# EAGLE board CT_schematic (EAGLE 7.6.0)

Size 100 x 80 mm. Coordinates in mm from the lower left corner, seen from the top.
Outline: 0,0 100,0 100,80 0,80 0,0
Copper layers (1*16): Top 0.035mm / dielectric 1.5mm / Bottom 0.035mm
Design rules "default": minimum track width 10mil, minimum drill 24mil, track to track 8mil, track to pad 8mil, pad to pad 8mil, via to via 8mil, smd to smd 8mil, copper to edge 40mil, drill to drill 8mil, minimum pad ring 10mil, minimum via ring 8mil, stop-mask expansion 4mil, vias tented up to drill 0mil, thermal gap 10mil

## Footprints (pad centres in the part's own frame; a part is rotated, then mirrored left to right if it is on the bottom)
C0603 = smd 0.8 x 0.8: 1 -0.762,0; 2 0.762,0
C0402 = smd 0.5 x 0.5: 1 -0.508,0; 2 0.508,0
C1206 = smd 1.3 x 1.6: 1 -1.524,0; 2 1.524,0
C1210 = smd 1.2 x 2.5: 1 -1.524,0; 2 1.524,0
EXV-9H = smd 3.505 x 1.676: 1 -2.857,0; 2 2.857,0
L0603 = smd 0.8 x 0.8: 1 -0.762,0; 2 0.762,0
L1210 = smd 1.2 x 2.5: 1 -1.524,0; 2 1.524,0
PJ-037B_PACKAGE = drill 3.7 square: 1 12,0 | drill 3.2 square: 2 6,0
R0603 = smd 0.8 x 0.8: 1 -0.762,0; 2 0.762,0
LQFP48 = smd 0.3 x 1.2: 1 -2.75,-4.25; 2 -2.25,-4.25; 3 -1.75,-4.25; 4 -1.25,-4.25; 5 -0.75,-4.25; 6 -0.25,-4.25; 7 0.25,-4.25; 8 0.75,-4.25; 9 1.25,-4.25; 10 1.75,-4.25; 11 2.25,-4.25; 12 2.75,-4.25; 25 2.75,4.25; 26 2.25,4.25; 27 1.75,4.25; 28 1.25,4.25; 29 0.75,4.25; 30 0.25,4.25; 31 -0.25,4.25; 32 -0.75,4.25; 33 -1.25,4.25; 34 -1.75,4.25; 35 -2.25,4.25; 36 -2.75,4.25 | smd 1.2 x 0.3: 13 4.25,-2.75; 14 4.25,-2.25; 15 4.25,-1.75; 16 4.25,-1.25; 17 4.25,-0.75; 18 4.25,-0.25; 19 4.25,0.25; 20 4.25,0.75; 21 4.25,1.25; 22 4.25,1.75; 23 4.25,2.25; 24 4.25,2.75; 37 -4.25,2.75; 38 -4.25,2.25; 39 -4.25,1.75; 40 -4.25,1.25; 41 -4.25,0.75; 42 -4.25,0.25; 43 -4.25,-0.25; 44 -4.25,-0.75; 45 -4.25,-1.25; 46 -4.25,-1.75; 47 -4.25,-2.25; 48 -4.25,-2.75
SSOP-16 = smd 1.981 x 0.356: 1 -2.464,2.223; 2 -2.464,1.587; 3 -2.464,0.953; 4 -2.464,0.318; 5 -2.464,-0.318; 6 -2.464,-0.953; 7 -2.464,-1.587; 8 -2.464,-2.223; 9 2.464,-2.223; 10 2.464,-1.587; 11 2.464,-0.953; 12 2.464,-0.318; 13 2.464,0.318; 14 2.464,0.953; 15 2.464,1.587; 16 2.464,2.223
182-009-MALE = drill 1.194 pad 1.524 octagon: 1 -5.537,10.923; 2 -2.769,10.923; 3 0,10.923; 4 2.769,10.923; 5 5.537,10.923; 6 -4.153,8.08; 7 -1.384,8.08; 8 1.384,8.08; 9 4.153,8.08 | hole 3.048: -12.446,9.501; 12.446,9.501
SOIC-8 = smd 1.6 x 0.6: 1 -2.7,1.905 | smd 1.55 x 0.6: 2 -2.7,0.635; 3 -2.7,-0.635; 4 -2.7,-1.905; 5 2.7,-1.905; 6 2.7,-0.635; 7 2.7,0.635; 8 2.7,1.905
SSOP-28 = smd 1.5 x 0.4: 1 -3.625,4.225; 2 -3.625,3.575; 3 -3.625,2.925; 4 -3.625,2.275; 5 -3.625,1.625; 6 -3.625,0.975; 7 -3.625,0.325; 8 -3.625,-0.325; 9 -3.625,-0.975; 10 -3.625,-1.625; 11 -3.625,-2.275; 12 -3.625,-2.925; 13 -3.625,-3.575; 14 -3.625,-4.225; 15 3.625,-4.225; 16 3.625,-3.575; 17 3.625,-2.925; 18 3.625,-2.275; 19 3.625,-1.625; 20 3.625,-0.975; 21 3.625,-0.325; 22 3.625,0.325; 23 3.625,0.975; 24 3.625,1.625; 25 3.625,2.275; 26 3.625,2.925; 27 3.625,3.575; 28 3.625,4.225
HTSS-105-01-G-D = drill 1 pad 1.8 square: 1 0,0 | drill 1 pad 1.8: 2 0,2.54; 3 2.54,0; 4 2.54,2.54; 5 5.08,0; 6 5.08,2.54; 7 7.62,0; 8 7.62,2.54; 9 10.16,0; 10 10.16,2.54
ABLS-25.000MHZ-B2F-T = smd 5.6 x 2.8: 1 -3.81,0; 2 5.69,0
ASEK = smd 1.4 x 1: 1 -1.1,-0.8; 2 1.1,-0.8; 3 1.1,0.8; 4 -1.1,0.8
WSON-8 = smd 0.3 x 0.6: 1 -0.75,0; 2 0.05,0; 3 0.85,0; 4 1.65,0; 5 1.65,3.8; 6 0.85,3.8; 7 0.05,3.8; 8 -0.75,3.8 | smd 3 x 2.6: PAD 0.45,1.9
SON-6 = smd 0.55 x 0.3: 1 -0.355,0.5 | smd 0.52 x 0.3: 2 -0.37,0; 3 -0.37,-0.5; 4 0.37,-0.5; 5 0.37,0; 6 0.37,0.5
SW_4-1437565-2 = smd 1.4 x 2.1: 1 -2.23,4.55; 2 -2.23,-4.55; 3 2.23,4.55; 4 2.23,-4.55
LGM67K-G1J2-24-Z = smd 0.8 x 1.4: A -2,0; C 0,0
NC7SZ125M5X = smd 1.3 x 0.7: 1 -1.3,0.95; 2 -1.3,0; 3 -1.3,-0.95; 4 1.3,-0.95; 5 1.3,0.95

## Placement (x,y rotation side)
C1  1e-06  [C0603]  -57.15,83.82 0 top  (outside the outline)
C2  1e-07  [C0603]  -60.96,83.82 0 top  (outside the outline)
C3  1e-07  [C0603]  -64.77,83.82 0 top  (outside the outline)
C4  1e-07  [C0603]  -68.58,83.82 0 top  (outside the outline)
C5  4.7e-06  [C0603]  -49.53,83.82 0 top  (outside the outline)
C6  1e-07  [C0603]  -72.39,83.82 0 top  (outside the outline)
C7  1e-07  [C0603]  -76.2,83.82 0 top  (outside the outline)
C8  1e-08  [C0603]  -80.01,83.82 0 top  (outside the outline)
C9  1e-06  [C0603]  -15.24,88.9 0 top  (outside the outline)
C10  1e-11  [C0402]  -76.2,88.9 0 top  (outside the outline)
C11  1e-11  [C0402]  -80.01,88.9 0 top  (outside the outline)
C12  1e-06  [C0603]  -19.05,88.9 0 top  (outside the outline)
C13  1e-06  [C0603]  -22.86,88.9 0 top  (outside the outline)
C14  2.2e-07  [C0603]  -53.34,83.82 0 top  (outside the outline)
C15  1e-06  [C0603]  -26.67,88.9 0 top  (outside the outline)
C16  1e-06  [C0603]  -30.48,88.9 0 top  (outside the outline)
C17  1e-06  [C0603]  -34.29,88.9 0 top  (outside the outline)
C18  1e-06  [C0603]  -38.1,88.9 0 top  (outside the outline)
C19  1e-07  [C0402]  -15.24,93.98 0 top  (outside the outline)
C20  1e-07  [C0402]  -19.05,93.98 0 top  (outside the outline)
C21  1e-07  [C0402]  -22.86,93.98 0 top  (outside the outline)
C22  1e-07  [C0402]  -26.67,93.98 0 top  (outside the outline)
C23  1e-07  [C0402]  -30.48,93.98 0 top  (outside the outline)
C24  1e-08  [C0402]  -34.29,93.98 0 top  (outside the outline)
C25  1e-08  [C0402]  -38.1,93.98 0 top  (outside the outline)
C26  1e-05  [C1206]  -48.26,76.2 0 top  (outside the outline)
C27  1e-05  [C1210]  -29.21,77.47 0 top  (outside the outline)
C28  1e-06  [C0603]  -41.91,88.9 0 top  (outside the outline)
C29  1e-05  [C1210]  -35.56,77.47 0 top  (outside the outline)
C30  1e-07  [C0402]  -41.91,93.98 0 top  (outside the outline)
C31  0.0001  [EXV-9H]  -38.1,69.85 0 top  (outside the outline)
C32  0.0001  [EXV-9H]  -49.53,69.85 0 top  (outside the outline)
C33  1e-08  [C0402]  -45.72,93.98 0 top  (outside the outline)
F1  240.0  [L0603]  -45.72,88.9 0 top  (outside the outline)
I1  1e-05  [L1210]  -41.91,77.47 0 top  (outside the outline)
J1  PJ-037B  [PJ-037B_PACKAGE]  -78.74,29.21 0 top  (outside the outline)
R1  10000.0  [R0603]  -30.48,83.82 0 top  (outside the outline)
R2  1000.0  [R0603]  -49.53,88.9 0 top  (outside the outline)
R3  1600.5  [R0603]  -53.34,88.9 0 top  (outside the outline)
R4  4700.0  [R0603]  -57.15,88.9 0 top  (outside the outline)
R5  10000.0  [R0603]  -35.56,83.82 0 top  (outside the outline)
R6  100000.0  [R0603]  -59.69,76.2 0 top  (outside the outline)
R7  120.0  [R0603]  -60.96,88.9 0 top  (outside the outline)
R8  100000.0  [R0603]  -64.77,76.2 0 top  (outside the outline)
R9  100000.0  [R0603]  -69.85,76.2 0 top  (outside the outline)
R10  2231.0  [R0603]  -64.77,88.9 0 top  (outside the outline)
R11  1000.0  [R0603]  -68.58,88.9 0 top  (outside the outline)
R12  100000.0  [R0603]  -74.93,76.2 0 top  (outside the outline)
R13  300000.0  [R0603]  -80.01,76.2 0 top  (outside the outline)
R14  100000.0  [R0603]  -15.24,83.82 0 top  (outside the outline)
R15  10000.0  [R0603]  -40.64,83.82 0 top  (outside the outline)
R16  10000.0  [R0603]  -45.72,83.82 0 top  (outside the outline)
R17  9100.0  [R0603]  -72.39,88.9 0 top  (outside the outline)
R18  680000.0  [R0603]  -20.32,83.82 0 top  (outside the outline)
R19  120000.0  [R0603]  -25.4,83.82 0 top  (outside the outline)
U1  stm32f072c8t7  [LQFP48]  -62.23,49.53 0 top  (outside the outline)
U2  LTC2804CGN-1#PBF  [SSOP-16]  -48.26,49.53 0 top  (outside the outline)
U3  182-009-113R531  [182-009-MALE]  -36.83,6.35 0 top  (outside the outline)
U4  MCP2562-E/SN  [SOIC-8]  -40.64,60.96 0 top  (outside the outline)
U5  182-009-113R531  [182-009-MALE]  -36.83,27.94 0 top  (outside the outline)
U6  ST3241EBPR  [SSOP-28]  -58.42,30.48 0 top  (outside the outline)
U7  HTSS-105-01-G-D  [HTSS-105-01-G-D]  -27.94,59.69 0 top  (outside the outline)
U8  ABLS-25.000MHZ-B2F-T  [ABLS-25.000MHZ-B2F-T]  -68.58,69.85 0 top  (outside the outline)
U9  ASEK-32.768KHz-ECST  [ASEK]  -29.21,69.85 0 top  (outside the outline)
U10  LP3878SDX-ADJ/NOPB  [WSON-8]  -62.23,58.42 0 top  (outside the outline)
U11  LP2951ACSDX/NOPB  [WSON-8]  -80.01,58.42 0 top  (outside the outline)
U12  TPS3895ADRYR  [SON-6]  -48.26,92.71 0 top  (outside the outline)
U13  4-1437565-2  [SW_4-1437565-2]  -27.94,49.53 0 top  (outside the outline)
U14  Q65110A2395  [LGM67K-G1J2-24-Z]  -17.78,77.47 0 top  (outside the outline)
U15  nc7sz125m5x  [NC7SZ125M5X]  -53.34,76.2 0 top  (outside the outline)

## Library data of the parts
C1-C33 F1 I1 J1 R1-R19 U1-U15 = circuit_tree

## Nets
CLK_CRYSTAL_U1_5: C10.1 U1.5 U8.1
CLK_CRYSTAL_U1_6: C11.1 U1.6 U8.2
CLK_U1_3: U1.3 U9.3
GND: C1.2 C2.2 C3.2 C4.2 C5.2 C6.2 C7.2 C8.2 C9.2 C10.2 C11.2 C12.2 C13.2 C15.2 C16.2 C17.2 C18.2 C19.2 C22.2 C23.2 C24.2 C25.2 C26.2 C27.2 C28.2 C29.2 C30.2 C31.2 C32.2 C33.2 J1.2 R2.2 R5.2 R11.2 R14.2 R17.2 R19.2 U1.8 U1.23 U1.35 U1.47 U2.8 U3.5 U4.2 U4.8 U5.5 U6.23 U6.25 U7.9 U9.2 U10.3 U10.PAD U11.3 U11.4 U11.PAD U12.2 U14.C U15.1 U15.3
NET_U1_7: R4.1 U1.7 U15.4
NET_U1_9: C8.1 C9.1 F1.1 U1.9
NET_U1_36: C7.1 U1.36
NET_U1_42: R3.1 U1.42 U14.A
NET_U1_43: R1.1 U1.43 U13.3 U13.4
NET_U1_44: R5.1 U1.44
NET_U2_6: C12.1 U2.6
NET_U2_7: C14.1 I1.2 U2.7
NET_U2_9: C13.1 U2.9
NET_U2_10: C14.2 U2.10
NET_U2_11: R6.1 U2.11
NET_U3_2: U2.1 U3.2
NET_U3_3: U2.3 U3.3
NET_U3_7: U2.2 U3.7
NET_U3_8: U2.4 U3.8
NET_U4_6: R7.2 U4.6
NET_U5_2: R7.2 U4.6 U5.2
NET_U5_3: R7.1 U4.7 U5.3
NET_U6_1: C21.1 U6.1
NET_U6_2: C21.2 U6.2
NET_U6_3: C23.1 U6.3
NET_U6_22: R8.1 U6.22
NET_U6_24: C20.2 U6.24
NET_U6_27: C22.1 U6.27
NET_U6_28: C20.1 U6.28
NET_U7_3: U6.4 U7.3
NET_U7_4: U6.5 U7.4
NET_U7_5: U6.9 U7.5
NET_U7_6: U6.10 U7.6
NET_U10_1: C25.1 U10.1
NET_U10_6: R10.2 R11.1 U10.6
NET_U10_8: R9.1 U10.8
NET_U11_5: R12.1 U11.5
NET_U11_7: R13.2 R14.1 U11.7
NET_U12_1: R16.1 R17.1 U12.1
NET_U12_3: R18.2 R19.1 U12.3
NET_U12_4: R15.1 U12.4 U15.2
NET_U13_1: R2.1 U13.1 U13.2
PROC_CAN_RX: U1.45 U4.4
PROC_CAN_TX: U1.46 U4.1
PROC_USART1_CTS: U1.32 U6.13
PROC_USART1_RTS: U1.33 U6.18
PROC_USART1_RX: U1.31 U6.19
PROC_USART1_TX: U1.30 U6.14
PROC_USART2_CTS: U1.10 U2.13
PROC_USART2_RTS: U1.11 U2.15
PROC_USART2_RX: U1.13 U2.16
PROC_USART2_TX: U1.12 U2.14
VCC_S1_8V6: C26.1 C28.1 C31.1 C32.1 J1.1 R9.2 U10.4 U11.8
VCC_TIER1_3V3: C1.1 C2.1 C3.1 C4.1 C5.1 C6.1 C15.1 C16.1 C18.1 C19.1 C24.1 C27.1 C30.1 C33.1 F1.2 I1.1 R1.2 R3.2 R4.2 R6.2 R8.2 R10.1 R15.2 R16.2 R18.1 U1.1 U1.24 U1.48 U2.5 U2.12 U4.5 U6.26 U9.4 U10.5 U12.6 U15.5
VCC_TIER1_5V0: C17.1 C29.1 R12.2 R13.1 U4.3 U11.1

## Tracks (layer width: path | path; a pad name or v marks a point on that pad's centre or on a via)
CLK_CRYSTAL_U1_5  (2 unrouted)
CLK_CRYSTAL_U1_6  (2 unrouted)
CLK_U1_3  (1 unrouted)
GND  (58 unrouted)
NET_U1_7  (2 unrouted)
NET_U1_9  (3 unrouted)
NET_U1_36  (1 unrouted)
NET_U1_42  (2 unrouted)
NET_U1_43  (3 unrouted)
NET_U1_44  (1 unrouted)
NET_U2_6  (1 unrouted)
NET_U2_7  (2 unrouted)
NET_U2_9  (1 unrouted)
NET_U2_10  (1 unrouted)
NET_U2_11  (1 unrouted)
NET_U3_2  (1 unrouted)
NET_U3_3  (1 unrouted)
NET_U3_7  (1 unrouted)
NET_U3_8  (1 unrouted)
NET_U4_6  (1 unrouted)
NET_U5_2  (2 unrouted)
NET_U5_3  (2 unrouted)
NET_U6_1  (1 unrouted)
NET_U6_2  (1 unrouted)
NET_U6_3  (1 unrouted)
NET_U6_22  (1 unrouted)
NET_U6_24  (1 unrouted)
NET_U6_27  (1 unrouted)
NET_U6_28  (1 unrouted)
NET_U7_3  (1 unrouted)
NET_U7_4  (1 unrouted)
NET_U7_5  (1 unrouted)
NET_U7_6  (1 unrouted)
NET_U10_1  (1 unrouted)
NET_U10_6  (2 unrouted)
NET_U10_8  (1 unrouted)
NET_U11_5  (1 unrouted)
NET_U11_7  (2 unrouted)
NET_U12_1  (2 unrouted)
NET_U12_3  (2 unrouted)
NET_U12_4  (2 unrouted)
NET_U13_1  (2 unrouted)
PROC_CAN_RX  (1 unrouted)
PROC_CAN_TX  (1 unrouted)
PROC_USART1_CTS  (1 unrouted)
PROC_USART1_RTS  (1 unrouted)
PROC_USART1_RX  (1 unrouted)
PROC_USART1_TX  (1 unrouted)
PROC_USART2_CTS  (1 unrouted)
PROC_USART2_RTS  (1 unrouted)
PROC_USART2_RX  (1 unrouted)
PROC_USART2_TX  (1 unrouted)
VCC_S1_8V6  (7 unrouted)
VCC_TIER1_3V3  (35 unrouted)
VCC_TIER1_5V0  (5 unrouted)